# Altium PCB PCB_SATA_SFP.PcbDoc (part 1 of 2)
Units mil, origin at the board's own origin, x right, y up, seen from the top; angles counter-clockwise.
Board outline 2874.02 x 708.66 mil, 4 copper layers (Top Layer, MidPlane_1, MidPlane_2, Bottom Layer), stack 61.899 mil thick; 52 components, 38 nets, 211 pads, 119 vias.
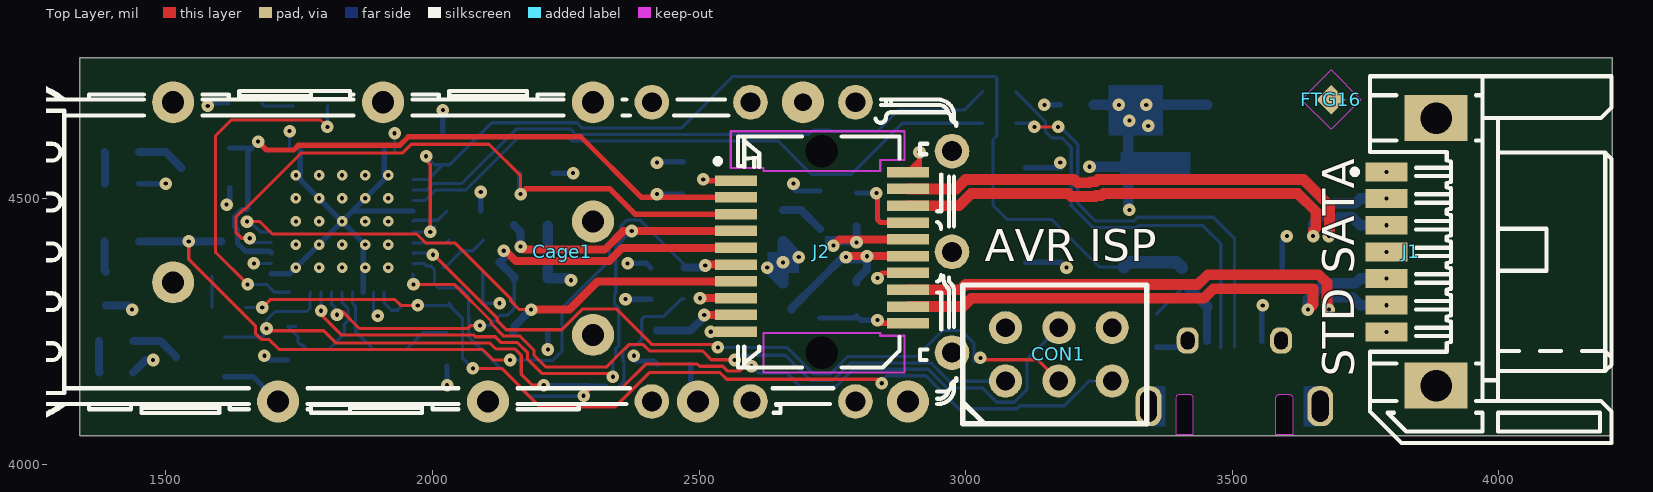
[diagram p0: Top Layer view]
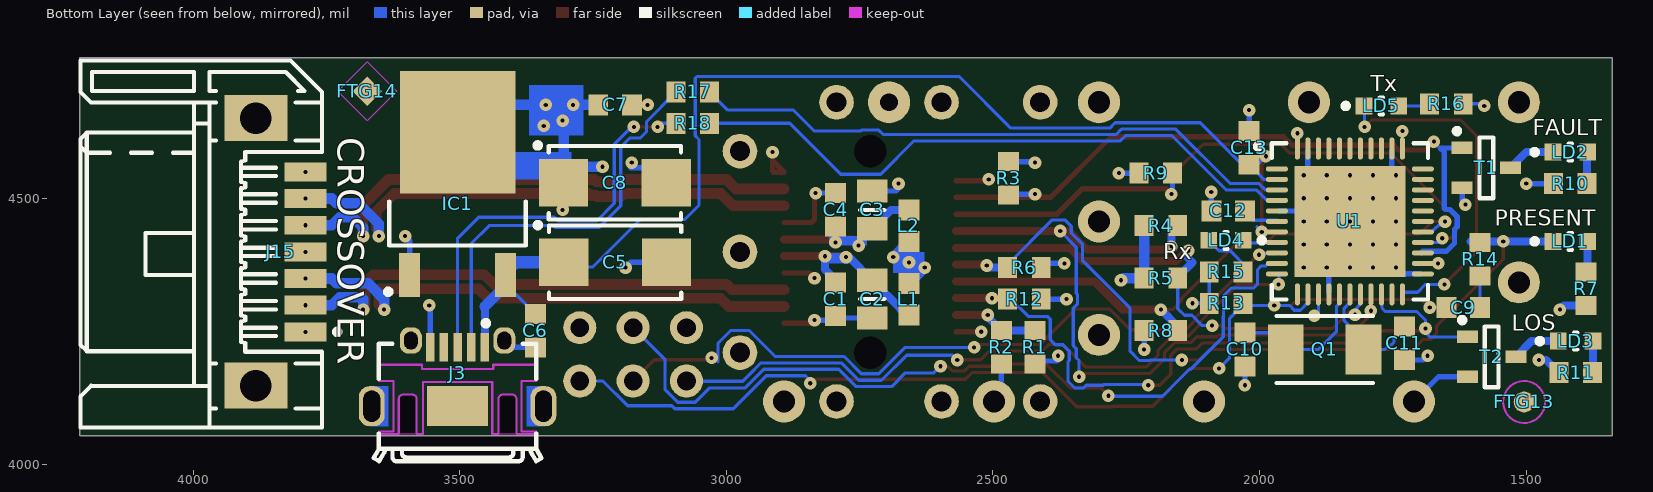
[diagram p1: Bottom Layer view, seen from below]
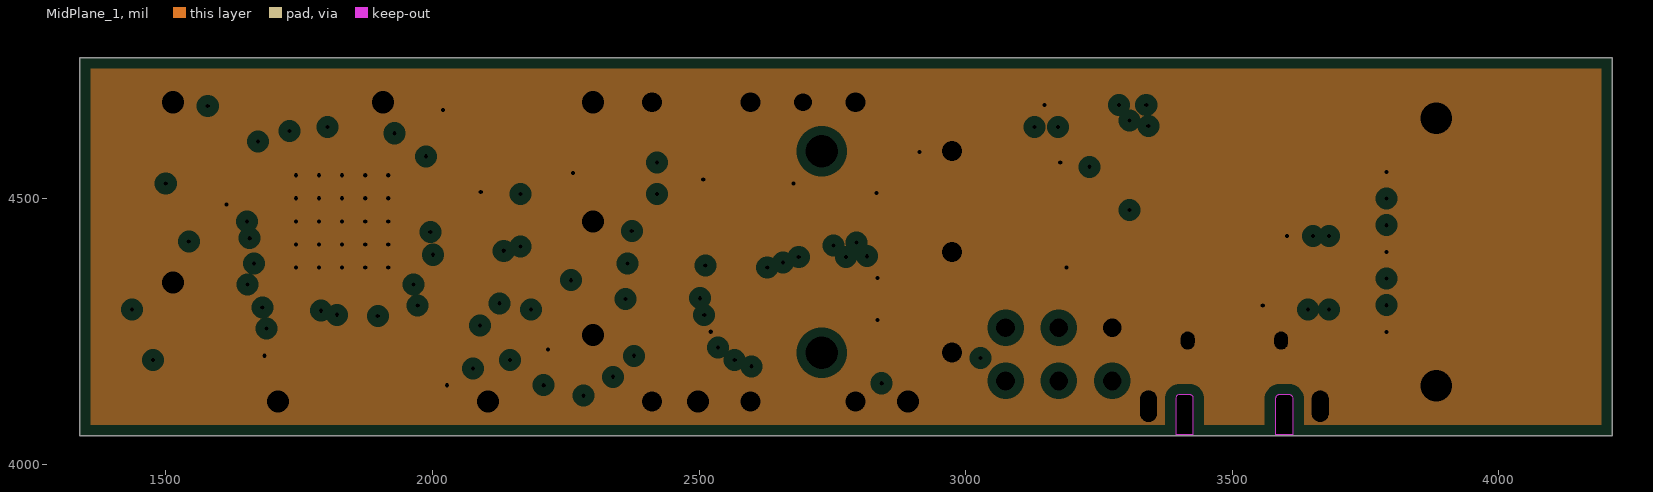
[diagram p2: MidPlane_1, clearances drawn from the general rule]
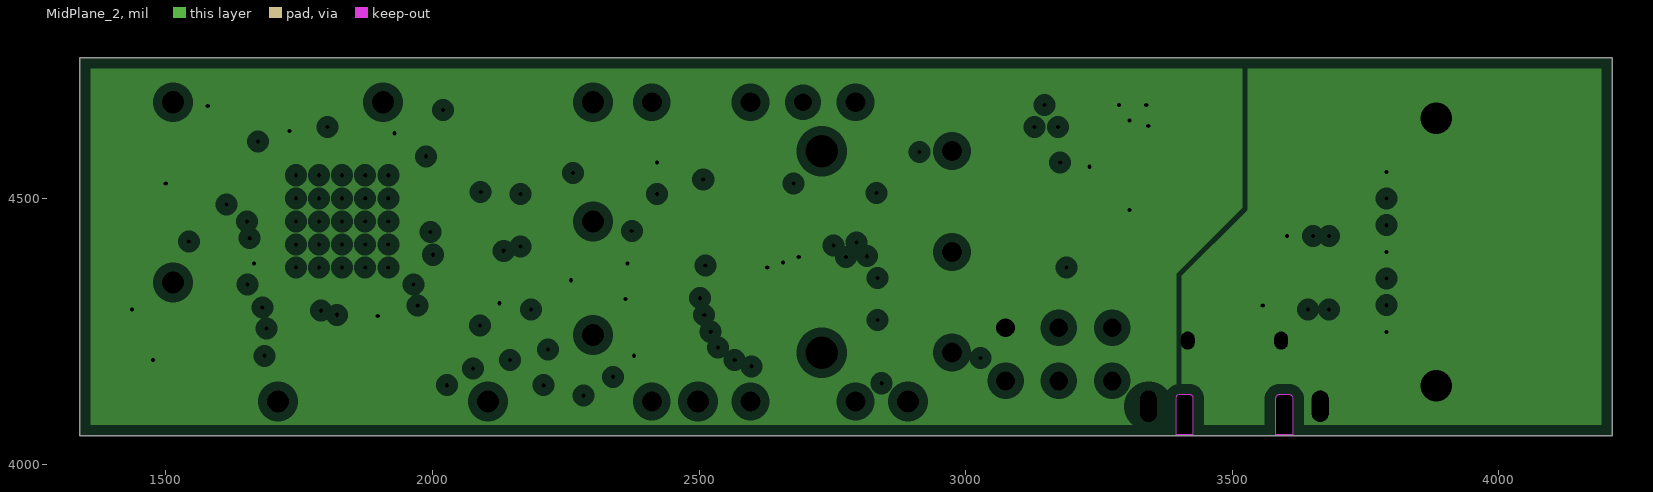
[diagram p3: MidPlane_2, clearances drawn from the general rule]
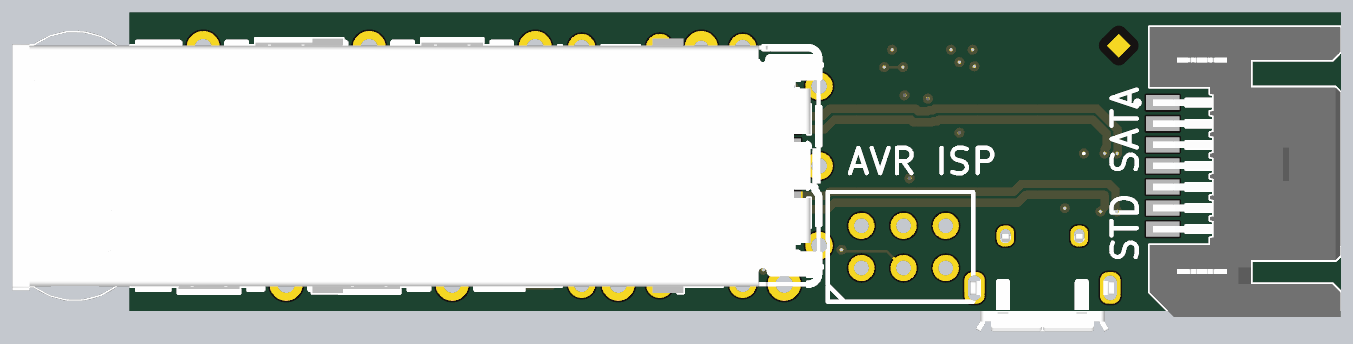
[diagram p4: 3D render of the assembled board from above, using the file's embedded part models]
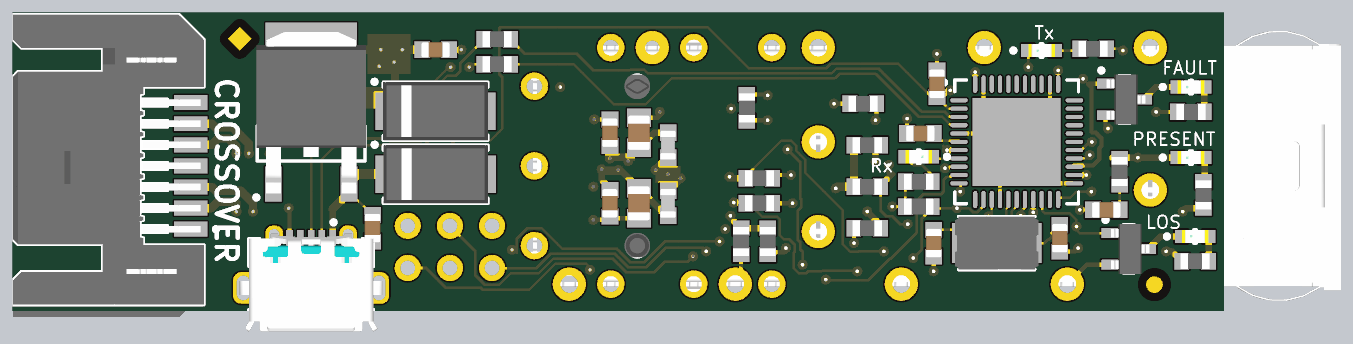
[diagram p5: 3D render of the assembled board from below, using the file's embedded part models]

## Layer stack, top to bottom
Top Solder: solder mask 0.4, Solder Resist, Dk 3.5
Top Layer: signal copper 1.4
Dielectric1: prepreg 14.1732, FR-4, Dk 4.8
MidPlane_1: plane copper 1.4, net GND
Dielectric3: core 27.9528, FR-4, Dk 4.8
MidPlane_2: plane copper 1.4, net (Multiple Nets)
Dielectric2: prepreg 14.1732, FR-4, Dk 4.8
Bottom Layer: signal copper 1.4
Bottom Solder: solder mask 0.4, Solder Resist, Dk 3.5

## Board outline
1338.58,4055.12 4212.6,4055.12 4212.6,4763.78 1338.58,4763.78

## Design rules (kind name [scope] priority, off if disabled: settings)
Clearance Clearance_KO [OnLayer('Keep-Out Layer')] p1: gap=10 ignorepadtopadclearanceinfootprint=FALSE except(0: Arc-Hole Track-Hole SMDPad-Hole THPad-Hole Via-Hole Fill-Hole Poly-Hole Region-Hole Text-Hole)
Clearance Clearance_Poly_DS [(InDifferentialPairClass('All Differential Pairs')) vs InPolygon] p2: gap=40 ignorepadtopadclearanceinfootprint=FALSE except(0: Arc-Hole Track-Hole SMDPad-Hole THPad-Hole Via-Hole Fill-Hole Poly-Hole Region-Hole Text-Hole)
Clearance [All] p3: gap=6 ignorepadtopadclearanceinfootprint=FALSE except(0: Arc-Hole Track-Hole SMDPad-Hole THPad-Hole Via-Hole Fill-Hole Poly-Hole Region-Hole Text-Hole; 15: Arc-Poly Track-Poly SMDPad-Poly THPad-Poly Via-Poly Fill-Poly Poly-Poly)
DiffPairsRouting [All] p1 off: maxlimit=6 minlimit=6 mostfreqgap=6 toplayer_minwidth=15 toplayer_maxwidth=15 toplayer_prefwidth=15 bottomlayer_minwidth=15 bottomlayer_maxwidth=15 bottomlayer_prefwidth=15 maxuncoupledlength=500
HoleSize [All] p1: absolutevalues=TRUE maxlimit=472.44 minlimit=1 maxpercent=80.000 minpercent=20.000
MinimumSolderMaskSliver [All] p1: minsoldermaskwidth=0
PlaneClearance [All] p1: clearance=16.73
PlaneConnect PlaneConnect_Via [IsVia] p1: planeconnectstyle=Direct reliefexpansion=20 reliefentries=4 reliefconductorwidth=10 reliefairgap=10
PlaneConnect [All] p2: planeconnectstyle=Relief reliefexpansion=10 reliefentries=4 reliefconductorwidth=10 reliefairgap=10
PolygonConnect PolygonConnect_Via [IsVia] p1: connectstyle=Direct reliefconductorwidth=10 reliefentries=4 polygonreliefangle="90 Angle" airgapwidth=10
PolygonConnect [All] p2: connectstyle=Relief reliefconductorwidth=10 reliefentries=4 polygonreliefangle="90 Angle" airgapwidth=10
RoomDefinition PCB_SATA_SFP [InComponentClass('PCB_SATA_SFP')] p1: confinementstyle=ConfineIn formatcopy=TRUE lockcomponents=FALSE outline -6375.21,3085.88 -4059.86,3085.88 -4059.86,3726.04 -6375.21,3726.04
RoutingVias [All] p1: holewidth=7.87 width=23.62 viastyle="Through Hole" minholewidth=7.87 minwidth=23.62 maxholewidth=23.62 maxwidth=47.24
SilkToSilkClearance [All] p1: silktosilkclearance=6
SilkToSolderMaskClearance SilkscreenOverComponentPads [IsPad] p1: minsilkscreentomaskgap=0 clearancetoexposedcopper=TRUE
SolderMaskExpansion [All] p1: expansion=4
Width Width_DS [(InDifferentialPairClass('All Differential Pairs'))] p1: maxlimit=12 minlimit=6 preferedwidth=12
Width [All] p2: maxlimit=23.54 minlimit=6 preferedwidth=23.54 minimp=50.000000 maximp=50.000000 favimp=50.000000
23 further rules are at their usual default settings.

## Classes and differential pairs
net class Diff_100Ohm: RD_N RD_P TD_N TD_P
differential pair TD: +TD_P -TD_N
differential pair RD: +RD_P -RD_N

## Components (designator, comment, footprint, x,y, rotation, side; value= is the part's Value field where it differs from the comment)
C1 "100nF" CAPC1608X87N 2795.28,4311.02 r90 bottom
C2 "10uF" CAPC2012X95N 2726.38,4311.02 r90 bottom
C3 "10uF" CAPC2012X95N 2726.38,4478.35 r270 bottom
C4 "100nF" CAPC1608X87N 2795.28,4478.35 r270 bottom
C5 "10uF" CAPMP6032X280N 3208.66,4379.92 r180 bottom
C6 "100nF" CAPC1608X87N 3358.27,4251.97 r90 bottom
C7 "100nF" CAPC1608X87N 3208.66,4675.2 r0 bottom
C8 "10uF" CAPMP6032X280N 3208.95,4529.28 r180 bottom
C9 "100nF" CAPC1608X87N 1618.11,4295.28 r180 bottom
C10 "22pF" CAPC1608X87N 2027.56,4216.54 r90 bottom
C11 "22pF" CAPC1608X87N 1728.35,4228.35 r90 bottom
C12 "1uF" CAPC1608X87N 2059.06,4476.38 r180 bottom
C13 "1uF" CAPC1608X87N 2019.68,4594.49 r270 bottom
Cage1 "SFP+" TYCO_2007198-1 2730.31,4399.61 r0 top locked
CON1 "DNP" HEADER3x2 3074.8,4157.48 r90 top
FTG13 "Use only in PCB" FIDUCIAL_TOP_C100-200 1503.94,4118.11 r90 bottom
FTG14 "Use only in PCB" FIDUCIAL_TOP_S100-200 3673.23,4700.79 r90 bottom
FTG16 "Use only in PCB" FIDUCIAL_TOP_S100-200 3685.04,4685.04 r90 top
IC1 "LD1117DT33CTR" TO228P972X240-3N-R540X510 3503.94,4527.56 r90 bottom
J1 "SATA" 3M_5607-4200-SH 3789.37,4399.61 r90 top
J2 "SFP" TYCO_1367073-1 2730.31,4399.61 r0 top locked
J3 "Micro-USB AB 2.0" HIROSE_ZX62RD-AB-5P8 3503.94,4220.47 r180 bottom
J15 "SATA" 3M_5607-4200-SH 3789.37,4399.61 r270 bottom
L1 "120R@100MHz" INDC1608X65N 2657.48,4311.02 r270 bottom
L2 "120R@100MHz" INDC1608X65N 2657.48,4448.82 r90 bottom
LD1 "Green" LED_KINGBRIGHT_KPH-1608CGCK 1417.32,4419.29 r180 bottom
LD2 "Green" LED_KINGBRIGHT_KPH-1608CGCK 1417.32,4586.61 r180 bottom
LD3 "Green" LED_KINGBRIGHT_KPH-1608CGCK 1407.48,4232.28 r180 bottom
LD4 "Green" LED_KINGBRIGHT_KPH-1608CGCK 2062.99,4421.26 r0 bottom
LD5 "Green" LED_KINGBRIGHT_KPH-1608CGCK 1771.65,4673.23 r180 bottom
Q1 "8MHz" XTAL_TXC_7A 1877.95,4216.54 r180 bottom
R1 "10k" RESC1608X55N 2421.26,4220.47 r270 bottom
R2 "0" RESC1608X55N 2484.25,4220.47 r90 bottom
R3 "10k" RESC1608X55N 2470.47,4537.4 r90 bottom
R4 "10k" RESC1608X55N 2185.04,4448.82 r0 bottom
R5 "10k" RESC1608X55N 2185.04,4350.39 r0 bottom
R6 "10k" RESC1608X55N 2440.94,4370.08 r180 bottom
R7 "240" RESC1608X55N 1387.8,4330.71 r270 bottom
R8 "470" RESC1608X55N 2185.04,4251.97 r180 bottom
R9 "10k" RESC1608X55N 2194.88,4547.24 r180 bottom
R10 "240" RESC1608X55N 1417.32,4527.56 r0 bottom
R11 "240" RESC1608X55N 1407.48,4173.23 r0 bottom
R12 "10k" RESC1608X55N 2440.94,4311.02 r180 bottom
R13 "10k" RESC1608X55N 2062.99,4303.15 r0 bottom
R14 "0" RESC1608X55N 1586.61,4385.83 r90 bottom
R15 "240" RESC1608X55N 2062.99,4362.2 r0 bottom
R16 "240" RESC1608X55N 1649.61,4677.17 r180 bottom
R17 "22" RESC1608X55N 3062.99,4699.8 r180 bottom
R18 "22" RESC1608X55N 3062.99,4640.75 r180 bottom
T1 "BSH103" SOT95P230X110-3N 1574.8,4557.09 r180 bottom
T2 "BSH103" SOT95P230X110-3N 1564.96,4202.76 r180 bottom
U1 "ATmega32U4-MU" 44PW_M 1830.71,4456.69 r180 bottom

## Footprints (in the part's own frame and the unit in brackets; to place one, negate y for a bottom-side part, rotate by r counter-clockwise, add the part's x,y. Pads: shape width x height; smd on the part's side, far side on the other; paste and mask are expansions set on the pad)
3M_5607-4200-SH [mm] "1.27mm (.050\") Pitch, Surface Mount, Right Angle, Serial ATA Plug (SATA)"
  rect 0.9x2 smd: 1(3.81,0) 2(2.54,0) 3(1.27,0) 4(0,0) 5(-1.27,0) 6(-2.54,0) 7(-3.81,0)
  rect 2.2x3 hole 1.5: 8(-6.37,-2.36) 8(6.37,-2.36)
  silkscreen extent -9.11,-10.71 8.36,1.64, body extent -9.11,-10.71 8.36,0.79, height 4
44PW_M [mm] "QFN, 44-Leads, Body 7x7mm, Pitch 0.5mm, Thermal Pad 5.3x5.3mm, IPC Low Density"
  oval 1.05x0.25 smd: 1(-3.475,2.5) 2(-3.475,2) 3(-3.475,1.5) 4(-3.475,1) 5(-3.475,0.5) 6(-3.475,0) 7(-3.475,-0.5) 8(-3.475,-1) 9(-3.475,-1.5) 10(-3.475,-2) 11(-3.475,-2.5) 23(3.475,-2.5) 24(3.475,-2) 25(3.475,-1.5) 26(3.475,-1) 27(3.475,-0.5) 28(3.475,0) 29(3.475,0.5) 30(3.475,1) 31(3.475,1.5) 32(3.475,2) 33(3.475,2.5)
  oval 0.25x1.05 smd: 12(-2.5,-3.475) 13(-2,-3.475) 14(-1.5,-3.475) 15(-1,-3.475) 16(-0.5,-3.475) 17(0,-3.475) 18(0.5,-3.475) 19(1,-3.475) 20(1.5,-3.475) 21(2,-3.475) 22(2.5,-3.475) 34(2.5,3.475) 35(2,3.475) 36(1.5,3.475) 37(1,3.475) 38(0.5,3.475) 39(0,3.475) 40(-0.5,3.475) 41(-1,3.475) 42(-1.5,3.475) 43(-2,3.475) 44(-2.5,3.475)
  rect 5.3x5.3 smd: 45(0,0)
  silkscreen extent -4.5,-3.73 3.73,3.72, body extent -3.57,-3.58 3.58,3.57, height 0.9
CAPC1608X87N [mm] "Chip Capacitor, Body 1.6x0.8mm IPC Medium Density"
  rect 0.95x1 smd: 1(-0.8,0) 2(0.8,0)
  body extent -0.87,-0.47 0.88,0.48, height 0.87
CAPC2012X95N [mm] "Chip Capacitor, Body 2.0x1.25mm, IPC Medium Density"
  rect 1.1x1.45 smd: 1(-0.9,0) 2(0.9,0)
  silkscreen extent 0,-0.58 0,0.58, body extent -1.05,-0.67 1.05,0.68, height 0.95
CAPMP6032X280N [mm] "Capacitor, Polarized, Molded  Body 6.0x3.2mm, IPC Medium Density"
  rect 2.35x2.25 smd: 1(-2.45,0) 2(2.45,0)
  silkscreen extent -3.8,-1.75 3.15,1.9, body extent -3.15,-1.75 3.15,1.75, height 2.8
FIDUCIAL_TOP_C100-200 [mm] "Round Fiducial Target, Top Layer, 1.0mm, Top Solder 2.0mm, Keepout =2.0mm"
  round 1 smd paste-0.51 mask+0.5: FTG2(0,0)
  Top Layer keep-out circle w0.1: c0,0 r1
FIDUCIAL_TOP_S100-200 [mm] "Square Fiducial Target, Top Layer, 1.0mm, Top Solder 2.0mm, Keepout =2.0mm"
  rect 1x1 smd rot 45 paste-0.51 mask+0.5: 1(0,0)
  Top Layer keep-out region: 1.414,0 0,-1.414 -1.414,0 0,1.414
HEADER3x2 [mil]
  round 62 hole 35: 1(0,0) 2(100,0) 3(0,-100) 4(100,-100) 5(0,-200) 6(100,-200)
  silkscreen extent -80,-265 180,80
HIROSE_ZX62RD-AB-5P8 [mm] "Right Angle, SMD Micro-USB Type AB - Reverse (Top mount), Shell Through Hole"
  rect 0.4x1.35 smd: 1(1.3,0) 2(0.65,0) 3(0,0) 4(-0.65,0) 5(-1.3,0)
  rrect80% 1.225x1.9 hole 0.8 slot 1.5 at 90 deg: 6(-4.088,-2.8) 6(4.088,-2.8)
  rrect80% 1.05x1.25 hole 0.65 slot 0.85 at 90 deg: 6(-2.225,0.325) 6(2.225,0.325)
  rect 2.9x1.9 smd: PastePad(0,-2.8)
  Top Layer region: 4.2,-3.75 4.2,-1.85 3.3,-1.85 3.3,-1.85 3.3,-3.75
  Top Layer region: -4.2,-1.85 -4.2,-3.75 -3.3,-3.75 -3.3,-3.75 -3.3,-1.85
  Top Layer keep-out lines w0.1: 3.75,-4.125 2.8,-4.125 2.8,-2.45 ccw(c2.6,-2.45) 2.6,-2.25 2.15,-2.25 ccw(c2.15,-2.45) 1.95,-2.45 1.95,-4.125 1.65,-4.125 1.65,-1.65 -1.65,-1.65 -1.65,-4.125 -1.95,-4.125 -1.95,-2.45 ccw(c-2.15,-2.45) -2.15,-2.25 -2.6,-2.25 ccw(c-2.6,-2.45) -2.8,-2.45 -2.8,-4.125 -3.75,-4.125 -3.75,-4 -3.05,-4 -3.05,-1.6 -3.75,-1.6 -3.75,-0.825 -1.7,-0.825 -1.7,-1.025 1.7,-1.025 1.7,-0.825 3.75,-0.825 3.75,-1.6 3.05,-1.6 3.05,-4 3.75,-4 3.75,-4.125
  Keep-Out Layer board cut-out: -2.8,-4.125 -2.8,-2.45 -2.785,-2.373 -2.741,-2.309 -2.676,-2.265 -2.6,-2.25 -2.6,-2.25 -2.15,-2.25 -2.073,-2.265 -2.009,-2.309 -1.965,-2.373 -1.95,-2.45 -1.95,-2.45 -1.95,-4.125
  Keep-Out Layer board cut-out: 1.95,-4.125 1.95,-2.45 1.965,-2.373 2.009,-2.309 2.074,-2.265 2.15,-2.25 2.15,-2.25 2.6,-2.25 2.677,-2.265 2.741,-2.309 2.785,-2.373 2.8,-2.45 2.8,-2.45 2.8,-4.125
  silkscreen extent -4,-5.42 4,1.27, body extent -4.32,-5.42 4.33,0.47, height 2.78
INDC1608X65N [mm] "Chip Inductor, 2-Leads, EIA 0603, Metric 1608, Body 1.6x0.8mm, IPC Medium Density"
  rect 1x1 smd: 1(-0.75,0) 2(0.75,0)
  body extent -0.87,-0.47 0.88,0.48, height 0.65
LED_KINGBRIGHT_KPH-1608CGCK [mm] "SMT Green LED, Case 0603, Body L 1.6 x W 0.8mm H 0.65mm"
  rect 0.8x0.8 smd: 1(-0.825,0) 2(0.825,0)
  silkscreen extent -1.83,-0.4 0.08,0.4, body extent -0.8,-0.4 0.8,0.4, height 0.65
RESC1608X55N [mm] "Chip Resistor, EIA 0603, Metric 1608, Body 1.6x0.8mm, IPC Medium Density"
  rect 0.9x1 smd: 1(-0.8,0) 2(0.8,0)
  body extent -0.87,-0.47 0.88,0.48, height 0.55
SOT95P230X110-3N [mm] "SOT23, 3 pin, Pitch 0.95mm - 1.3mm W X 2.9mm L X 1.1mm H, IPC Medium Density"
  rect 1x0.6 smd: 1(-1.15,0.95) 2(-1.15,-0.95) 3(1.15,0)
  silkscreen extent -1.53,-1.45 0.33,1.87, body extent -1.08,-1.5 1.25,1.5, height 1.1
TO228P972X240-3N-R540X510 [mm] "DPAK TO-252, 2.28mm pitch; 2 pin, 9.725mm L X 6.10mm W X 2.40mm H body, IPC Medium Density"
  rect 2.1x1 smd: 1(-4.35,2.28) 2(-4.35,-2.28)
  rect 5.85x5.5 smd: 3(2.45,0)
  silkscreen extent -5.27,-3.25 -0.85,3.43, body extent -4.9,-3.3 4.82,3.3, height 2.4
TYCO_1367073-1 [mm] "20 Position, Pitch 0.8mm SFP Receptacle (Small Form-factor Pluggable)"
  rect 2x0.5 smd: 1(-4.1,3.395) 2(-4.1,2.595) 3(-4.1,1.795) 4(-4.1,0.995) 5(-4.1,0.195) 6(-4.1,-0.605) 7(-4.1,-1.405) 8(-4.1,-2.205) 9(-4.1,-3.005) 10(-4.1,-3.805) 11(4.1,-3.405) 12(4.1,-2.605) 13(4.1,-1.805) 14(4.1,-1.005) 15(4.1,-0.205) 16(4.1,0.595) 17(4.1,1.395) 18(4.1,2.195) 19(4.1,2.995) 20(4.1,3.795)
  round 0.5 hole 1.55 unplated mask+0.525: MTG1(0,4.795) MTG2(0,-4.805)
  Top Layer keep-out lines w0.1: -4.34,3.985 -4.34,5.745 3.94,5.745 3.94,4.385 2.78,4.385 2.78,3.845 -2.78,3.845 -2.78,3.985 -4.34,3.985 ; -2.78,-5.755 3.94,-5.755 3.94,-4.805 3.94,-3.995 2.78,-3.995 2.78,-3.855 -2.78,-3.855 -2.78,-4.395 -2.78,-5.755
  silkscreen extent -5.08,-5.51 3.7,5.5, body extent -4.5,-5.5 4.5,5.5, height 5.22
TYCO_2007198-1 [mm] "SFP+ 1x1 Press Fit Cage"
  round 2 hole 1.05: 1(-30.9,7.125) 2(-20.9,7.125) 3(-10.9,7.125) 4(-10.9,1.445) 5(-30.9,-1.455) 6(-10.9,-3.955) 7(-25.9,-7.125) 8(-15.9,-7.125) 9(-5.9,-7.125) 10(4.1,-7.125)
  round 1.65 hole 0.95: 11(-8.1,7.125) 12(-3.4,7.125) 13(1.6,7.125) 14(6.2,4.8) 15(6.2,0) 16(6.2,-4.8) 17(-8.1,-7.125) 18(-3.4,-7.125) 19(1.6,-7.125)
  round 2 hole 0.85: 20(-0.9,7.125)
  silkscreen extent -42.4,-8.15 6.4,8.15, body extent -42.4,-8.15 6.4,8.15, height 10.6
XTAL_TXC_7A [mm] "2 Pins, 3.2x5mm, SMD Glass Seam Sealing Crystal, 7A Serie"
  rect 1.7x2.4 smd: 1(-1.85,0) 2(1.85,0)
  silkscreen extent -2.3,-1.6 2.3,1.6, body extent -2.5,-1.6 2.5,1.6, height 1.2

## Part data
C1 C4 C6 C7 C9: library part CC0603_100NF_50V_10%_X5R, "Non-polarised capacitor", Case=0603, Manufacturer=GENERIC, Manufacturer1 ComponentHeight=0.9mm, Manufacturer1 Example=TDK, Manufacturer1 Part Number=C1608X5R1H104K080AA, Tolerance=±10%, Voltage=50V, Author="CERN DEM MR", Component Type=Standard, CreateDate=08.01.2016, HelpURL=\\cern.ch\dfs\Applications\Altium\Datasheets\CC0603_X5R_TDK_C.pdf, LatestRevisionDate=08.01.2016, Manufacturer Part Number=CC0603_100NF_50V_10%_X5R, Mounted=Yes, Part Description="SMD Multilayer Chip Ceramic Capacitor", Part Number=CC0603_100NF_50V_10%_X5R, Pin Count=2, Sense=No, SMD=Yes, Socket=No, Status=None, TC=X5R
C2 C3: library part CC0805_10UF_25V_10%_X5R, "Non-polarised capacitor", Case=0805, Manufacturer=GENERIC, Manufacturer1 ComponentHeight=0.95mm, Manufacturer1 Example=MURATA, Manufacturer1 Part Number=GRM219R61E106KA12D, Tolerance=±10%, Voltage=25V, Author="CERN DEM JLC", Component Type=Standard, CreateDate=25.10.2012, HelpURL=\\cern.ch\dfs\Applications\Altium\Datasheets\CC0805_X5R_MURATA_GRM.pdf, LatestRevisionDate=06.09.2016, Manufacturer Part Number=CC0805_10UF_25V_10%_X5R, Mounted=Yes, Part Description="SMD Multilayer Chip Ceramic Capacitor", Part Number=CC0805_10UF_25V_10%_X5R, Pin Count=2, Sense=No, SMD=Yes, Socket=No, Status=Preferred, TC=X5R
C5 C8: library part CTE6032-28_10UF_25V_10%_LESR0300, "Polarised capacitor", Case=C, Manufacturer=GENERIC, Manufacturer1 ComponentHeight=2.8mm, Manufacturer1 Example="VISHAY SPRAGUE", Manufacturer1 Part Number=TR3C106K025C0300, Tolerance=±10%, Voltage=25V, Author="CERN DEM JLC", Component Type=Standard, CreateDate=30.08.2011, HelpURL=\\cern.ch\dfs\Applications\Altium\Datasheets\CTE_VISHAY_TR3.pdf, LatestRevisionDate=30.08.2011, Manufacturer Part Number=CTE6032-28_10UF_25V_10%_LESR0300, Mounted=Yes, Part Description="Low ESR 0R3 Solid Tantalum Chip Capacitor", Part Number=CTE6032-28_10UF_25V_10%_LESR0300, Pin Count=2, Sense=No, SMD=Yes, Socket=No, Status=Preferred
C10 C11: library part CC0603_22PF_50V_5%_NP0, "Non-polarised capacitor", Case=0603, Manufacturer=GENERIC, Manufacturer1 ComponentHeight=0.87mm, Manufacturer1 Example=PHYCOMP, Manufacturer1 Part Number=223886715229, Tolerance=±5%, Voltage=50V, Author="CERN DEM JLC", Component Type=Standard, CreateDate=03.12.2007, HelpURL=\\cern.ch\dfs\Applications\Altium\Datasheets\CC0603_NP0_PHYCOMP.pdf, LatestRevisionDate=03.12.2007, Manufacturer Part Number=CC0603_22PF_50V_5%_NP0, Mounted=Yes, Part Description="SMD Multilayer Chip Ceramic Capacitor", Part Number=CC0603_22PF_50V_5%_NP0, Pin Count=2, Sense=No, SMD=Yes, Socket=No, Status=Preferred, TC=C0G/NP0
C12 C13: library part CC0603_1UF_16V_10%_X7R, "Non-polarised capacitor", Case=0603, Manufacturer=GENERIC, Manufacturer1 ComponentHeight=0.9mm, Manufacturer1 Example="YAGEO PHYCOMP", Manufacturer1 Part Number=223878615663, Manufacturer Part Number=CC0603_1uF_16V_10%_X7R, Tolerance=±10%, Voltage=16V, Author="CERN DEM JLC", Component Type=Standard, CreateDate=03.12.2007, HelpURL=\\cern.ch\dfs\Applications\Altium\Datasheets\CC0603_X7R_PHYCOMP.pdf, LatestRevisionDate=17.04.2015, Mounted=Yes, Part Description="SMD Multilayer Chip Ceramic Capacitor", Part Number=CC0603_1UF_16V_10%_X7R, Pin Count=2, Sense=No, SMD=Yes, Socket=No, Status=None, TC=X7R
Cage1: library part TYCO_2007198-1, "SFP+ 1x1 Cage (20Pins)", Manufacturer="TYCO ELECTRONICS", Manufacturer Part Number=2007198-1, Author="CERN DEM JLC", ClassName=Connectors, ComponentHeight=9.7mm, Component Type=Standard, CreateDate=04.06.2013, Family=SFP+, HelpURL=\\cern.ch\dfs\Applications\Altium\Datasheets\TYCO_2007198-1.pdf, LatestRevisionDate=12.06.2013, Mounted=Yes, Part Description="1x1 Press Fit Cage For Use with SFP+ Connector (Small Form-factor Pluggable)", Part Number=TYCO_2007198-1, Pin Count=20, PressFit=Yes, Sense=No, SMD=No, Socket=No, Status=None
CON1: library part CON_ISP, "6x 2.54mm SMT  dual row pin header"
FTG13: library part FIDUCIAL_TARGET_C100-200, "Fiducial Target", Author="CERN DEM JLC", ComponentHeight=0mm, Component Type="Standard (No BOM)", CreateDate=09.02.2010, Family=Fiducial, HelpURL=Undefined, LatestRevisionDate=04.04.2012, Mounted=No, PackageDescription="Round Fiducial Target, Top Layer, 1.0mm, Top Solder 2.0mm, Keepout =2.0mm", Part Description="Round Fiducial Target, Top Layer, 1.0mm, Top Solder 2.0mm, Keepout =2.0mm", Part Number=FIDUCIAL_TARGET_C100-200, Pin Count=1, Sense=No, SMD=Yes, Socket=No, Status=None
FTG14 FTG16: library part FIDUCIAL_TARGET_S100-200, "Fiducial Target", Author="CERN DEM JLC", ComponentHeight=0mm, Component Type="Standard (No BOM)", CreateDate=09.02.2010, Family=Fiducial, HelpURL=Undefined, LatestRevisionDate=04.04.2012, Mounted=No, PackageDescription="Square Fiducial Target, Top Layer, 1.0mm, Top Solder 2.0mm, Keepout =2.0mm", Part Description="Square Fiducial Target, Top Layer, 1.0mm, Top Solder 2.0mm, Keepout =2.0mm", Part Number=FIDUCIAL_TARGET_S100-200, Pin Count=1, Sense=No, SMD=Yes, Socket=No, Status=None
IC1: "3-Terminal Regulator 1=GND 2=IN 3=OUT", Case=DPAK, Manufacturer="ST MICROELECTRONICS", Author="CERN DEM JLC", Bonding=No, ComponentHeight=2.4mm, Component Type=Standard, CreateDate=08.06.2011, Device=LD1117DT33CTR, HelpURL=\\cern.ch\dfs\Applications\Altium\Datasheets\LD1117DT33CTR.pdf, LatestRevisionDate=08.06.2011, Manufacturer Part Number=LD1117DT33CTR, Mounted=Yes, PackageDescription="DPAK TO-252, 2.28mm pitch; 2 pin, 9.725mm L X 6.10mm W X 2.40mm H body, IPC Medium Density", Part Description="3.3V 800mA Low drop fixed and adjustable positive voltage regulators", Part Number=LD1117DT33CTR, Pin Count=3, PressFit=No, Sense=No, SMD=Yes, Socket=No
J1 J15: library part 3M_5607-4200-SH, "7 Pin + 1 Shield SATA Receptacle", Manufacturer=3M, Manufacturer Part Number=5607-4200-SH, Author="CERN DEM JLC", ComponentHeight=4mm, Component Type=Standard, CreateDate=14.02.2011, Family=SATA, HelpURL=\\cern.ch\dfs\Applications\Altium\Datasheets\3M_5607-4200-SH.pdf, LatestRevisionDate=31.05.2011, Mounted=Yes, Part Description="Signal Plug, Surfacemount, Right Angle,  Serial Advanced Technology Attachment (SATA) Connector, 5607 Series", Part Number=3M_5607-4200-SH, Pin Count=8, PressFit=No, Sense=No, SMD=Yes, Socket=No, Status=None
J2: library part TYCO_1367073-1, "20 Position SFP  Connector (Small Form-factor Pluggable)", Manufacturer="TYCO ELECTRONICS", Manufacturer Part Number=1367073-1, Author="CERN DEM JLC", ComponentHeight=5.4mm, ComponentLink1Description=Application, ComponentLink1URL=\\cern.ch\dfs\Applications\Altium\Datasheets\TYCO_SFP_Application.pdf, ComponentLink2Description="SFP Specification", ComponentLink2URL=\\cern.ch\dfs\Applications\Altium\Datasheets\Tyco_SFP_Specification.pdf, Component Type=Standard, CreateDate=25.01.2010, Family=SFP, HelpURL=\\cern.ch\dfs\Applications\Altium\Datasheets\TYCO_1367073-1.pdf, LatestRevisionDate=25.01.2010, Mounted=Yes, Part Description="20 Position, Pitch 0.8mm SFP Receptacle (Small Form-factor Pluggable)", Part Number=TYCO_1367073-1, Pin Count=20, PressFit=No, Sense=No, SMD=Yes, Socket=No, Status=None
J3: library part HIROSE_ZX62RD-AB-5P8, "5 Pin + 1 Shield USB Receptacle", Manufacturer="HIROSE (HRS)", Manufacturer Part Number=ZX62RD-AB-5P8, Author="CERN DEM JLC", ClassName=Connectors, ComponentHeight=2.35mm, ComponentLink1Description=Package-Drawing, ComponentLink1URL=\\cern.ch\dfs\Applications\Altium\Datasheets\HIROSE_ZX62RD-AB-5P8_Package-Drawing.pdf, Component Type=Standard, CreateDate=29.10.2014, Family="Micro-USB AB 2.0", HelpURL=\\cern.ch\dfs\Applications\Altium\Datasheets\HIROSE_ZX62RD-AB-5P8.pdf, LatestRevisionDate=29.10.2014, Mounted=Yes, Part Description="Micro-USB 2.0 Right Angle, SMD Type AB - Reverse (Top mount), Shell Through Hole", Part Number=HIROSE_ZX62RD-AB-5P8, Pin Count=7, PressFit=No, Sense=No, SMD=Yes, Socket=No, Status=None
L1 L2: library part IND0603_MURATA_BLM18SG121TN1D, "Inductor", Case=0603, Manufacturer=MURATA, Manufacturer Part Number=BLM18SG121TN1D, Power=3A, Resistance=0.025R, Tolerance=±25%, Author="CERN DEM JLC", ComponentHeight=0.65mm, Component Type=Standard, CreateDate=23.07.2014, HelpURL=\\cern.ch\dfs\Applications\Altium\Datasheets\IND0603_MURATA_BLM18S.pdf, LatestRevisionDate=23.07.2014, Mounted=Yes, Part Description="SMD EMIFIL Suppression Chip Ferrite Bead", Part Number=IND0603_MURATA_BLM18SG121TN1D, Pin Count=2, Sense=No, SMD=Yes, Socket=No, Status=None
LD1 LD2 LD3 LD4 LD5: library part LED_KINGBRIGHT_KPH-1608CGCK, "LED Green 1C 2A", Manufacturer=KINGBRIGHT, Manufacturer Part Number=KPH-1608CGCK, Author="CERN DEM JLC", Bonding=No, Color=Green, ComponentHeight=0.65mm, Component Type=Standard, CreateDate=03.07.2017, HelpURL=\\cern.ch\dfs\Applications\Altium\Datasheets\LED_KINGBRIGHT_KPH-1608CGCK.pdf, LatestRevisionDate=03.07.2017, Mounted=Yes, PackageDescription="SMT Green LED, Case 0603, Body L 1.6 x W 0.8mm H 0.65mm", Part Description="SMD Green LED, Case 1.6mmX0.8mm(0603), 0.65mm Thickness", Part Number=LED_KINGBRIGHT_KPH-1608CGCK, Pin Count=2, PressFit=No, Sense=No, SMD=Yes, Socket=No
Q1: library part XTAL_8MHZ_TXC_7A-8.000MAAE-T, "Quartz Crystal", Manufacturer="TXC CORPORATION", Manufacturer Part Number=7A-8.000MAAE-T, Author="CERN DEM JLC", Bonding=No, ComponentHeight=1.2mm, Component Type=Standard, CreateDate=09.10.2014, HelpURL=\\cern.ch\dfs\Applications\Altium\Datasheets\XTAL_TXC_7A.pdf, LatestRevisionDate=12.11.2014, Mounted=Yes, PackageDescription="2 Pins, 3.2x5mm, SMD Glass Seam Sealing Crystal, 7A Serie", Part Description="Tolerance: ±30ppm, Stability: ±30ppm, -20°C to +70°C, 12pF, SMD Glass Seam Sealing Crystal, 7A Series", Part Number=XTAL_8MHZ_TXC_7A-8.000MAAE-T, Pin Count=2, PressFit=No, Sense=No, SMD=Yes, Socket=No
R1 R3 R4 R5 R6 R9 R12 R13: library part R0603_10K_1%_0.1W_100PPM, "Resistor - 1%", Case=0603, Manufacturer=GENERIC, Manufacturer1 ComponentHeight=0.55mm, Manufacturer1 Example="NIC COMPONENT", Manufacturer1 Part Number=NRC06F1002TRF, Power=0.1W, Tolerance=±1%, Author="CERN DEM JLC", Component Type=Standard, CreateDate=03.12.2007, HelpURL=\\cern.ch\dfs\Applications\Altium\Datasheets\R0603_NIC_NRC.pdf, LatestRevisionDate=13.03.2008, Manufacturer Part Number=R0603_10K_1%_0.1W_100PPM, Mounted=Yes, Part Description="General Purpose Thick Film Chip Resistor", Part Number=R0603_10K_1%_0.1W_100PPM, Pin Count=2, PressFit=No, Sense=No, SMD=Yes, Socket=No, Status=Preferred, TC=±100ppm/°C
R2 R14: library part R0603_0R_JUMPER, "Resistor", Case=0603, Manufacturer=GENERIC, Manufacturer1 ComponentHeight=0.55mm, Manufacturer1 Example="NIC COMPONENT", Manufacturer1 Part Number=NRC06Z0, Author="CERN DEM JLC", Component Type=Standard, CreateDate=03.12.2007, HelpURL=\\cern.ch\dfs\Applications\Altium\Datasheets\R0603_NIC_NRC.pdf, LatestRevisionDate=13.03.2008, Manufacturer Part Number=R0603_0R_JUMPER, Mounted=Yes, Part Description="1A (0.05R Max DC Resistance) Zero Ohm Jumper", Part Number=R0603_0R_JUMPER, Pin Count=2, PressFit=No, Sense=No, SMD=Yes, Socket=No, Status=Preferred
R7 R10 R11 R15 R16: library part R0603_240R_1%_0.1W_100PPM, "Resistor - 1%", Case=0603, Manufacturer=GENERIC, Manufacturer1 ComponentHeight=0.55mm, Manufacturer1 Example="NIC COMPONENT", Manufacturer1 Part Number=NRC06F2400TRF, Power=0.1W, Tolerance=±1%, Author="CERN DEM JLC", Component Type=Standard, CreateDate=03.12.2007, HelpURL=\\cern.ch\dfs\Applications\Altium\Datasheets\R0603_NIC_NRC.pdf, LatestRevisionDate=13.03.2008, Manufacturer Part Number=R0603_240R_1%_0.1W_100PPM, Mounted=Yes, Part Description="General Purpose Thick Film Chip Resistor", Part Number=R0603_240R_1%_0.1W_100PPM, Pin Count=2, PressFit=No, Sense=No, SMD=Yes, Socket=No, Status=Preferred, TC=±100ppm/°C
R8: library part R0603_470R_1%_0.1W_100PPM, "Resistor - 1%", Case=0603, Manufacturer=GENERIC, Manufacturer1 ComponentHeight=0.55mm, Manufacturer1 Example="NIC COMPONENT", Manufacturer1 Part Number=NRC06F4700TRF, Power=0.1W, Tolerance=±1%, Author="CERN DEM JLC", Component Type=Standard, CreateDate=03.12.2007, HelpURL=\\cern.ch\dfs\Applications\Altium\Datasheets\R0603_NIC_NRC.pdf, LatestRevisionDate=13.03.2008, Manufacturer Part Number=R0603_470R_1%_0.1W_100PPM, Mounted=Yes, Part Description="General Purpose Thick Film Chip Resistor", Part Number=R0603_470R_1%_0.1W_100PPM, Pin Count=2, PressFit=No, Sense=No, SMD=Yes, Socket=No, Status=Preferred, TC=±100ppm/°C
R17 R18: library part R0603_22R_1%_0.1W_100PPM, "Resistor - 1%", Case=0603, Manufacturer=GENERIC, Manufacturer1 ComponentHeight=0.55mm, Manufacturer1 Example="NIC COMPONENT", Manufacturer1 Part Number=NRC06F22R0TRF, Power=0.1W, Tolerance=±1%, Author="CERN DEM JLC", Component Type=Standard, CreateDate=03.12.2007, HelpURL=\\cern.ch\dfs\Applications\Altium\Datasheets\R0603_NIC_NRC.pdf, LatestRevisionDate=13.03.2008, Manufacturer Part Number=R0603_22R_1%_0.1W_100PPM, Mounted=Yes, Part Description="General Purpose Thick Film Chip Resistor", Part Number=R0603_22R_1%_0.1W_100PPM, Pin Count=2, PressFit=No, Sense=No, SMD=Yes, Socket=No, Status=Preferred, TC=±100ppm/°C
T1 T2: "N-CHANNEL MOSFET WITH DIODE", Case=SOT23-3, Manufacturer=NEXPERIA, Author="CERN DEM JLC", Bonding=No, ComponentHeight=1.1mm, Component Type=Standard, CreateDate=16.03.2010, Device=BSH103, HelpURL=\\cern.ch\dfs\Applications\Altium\Datasheets\BSH103.pdf, LatestRevisionDate=20.06.2017, Manufacturer Part Number=BSH103, Mounted=Yes, PackageDescription="SOT23, 3 pin, Pitch 0.95mm - 1.3mm W X 2.9mm L X 1.1mm H, IPC Medium Density", Part Description="30V 850mA N-Channel Enhancement Mode Field-Effect Transistor", Part Number=BSH103, Pin Count=3, PressFit=No, Sense=No, SMD=Yes, Socket=No
U1: library part CMP-0095-00166-2, "8-bit AVR Microcontroller, 2.7-5.5V, 16MHz, 32KB Flash, 1KB EEPROM, 2.5KB SRAM, USB Controller, 44-pin QFN, Industrial Grade (-40°C to 85°C), Ext Osc", Code_JEDEC=MO-220-VKKD-1, ComponentLink1Description="Manufacturer URL", ComponentLink1URL=http://www.atmel.com/, ComponentLink2Description="ATmega16U4/32U4 Datasheet", ComponentLink2URL=http://www.atmel.com/dyn/resources/prod_documents/doc7766.pdf, ComponentLink3Description="ATmega16U4 ATmega32U4 Summary", ComponentLink3URL=http://www.atmel.com/dyn/resources/prod_documents/7766S.pdf, DatasheetVersion="revF, Nov-2010", PackageDescription="44-Pin Quad Flat No-Lead Package, 7 x 7 mm Body, 0.5 mm Pitch (QFN)", PackageReference=44PW, PackageVersion="revG, Sep-2009", RevisionNote="DatasheetVersion, PackageVersion & PCB updated. URLs added."

## Via types
v1: diameter 23.62, hole 7.87, Top Layer to Bottom Layer, tented both sides, 94 vias
v2: diameter 19.68, hole 7.87, Top Layer to Bottom Layer, tented both sides, 25 vias

## Nets (pads, with @x,y where several pads share a name; then routed paths per layer and width w, separated by ;. In a path a pad name is that pad's centre, name@x,y a point inside that pad or via, vN(x,y) a via of type N, cw(c..) or ccw(c..) an arc to the next point about the centre after c; other vN are vias at no path point)
D_N: J3.2 R17.1 | length 775.5
  Bottom Layer w6: R17.1 3094.49,4698.91 3149.76,4643.65 3149.76,4624.7 3161.42,4613.04 3181.02,4613.04 3197.97,4596.08 3197.97,4485.85 3238.28,4445.54 3320.68,4445.54 3323.96,4448.82 3444.88,4448.82 3478.35,4415.35 J3.2
D_P: J3.3 R18.1 | length 764.1
  Top Layer w6: v1(3128.95,4633.85) v1(3173.22,4633.85)
  Bottom Layer w6: R18.1 v1@3122.05,4640.75 ; v1(3173.22,4633.85) v1@3177.16,4633.85 ; v1@3177.17,4633.86 3209.97,4601.05 3209.97,4490.82 3243.25,4457.54 3315.71,4457.54 3322.74,4464.57 3464.57,4464.57 3503.94,4425.2 J3.3
GND: C1.1 C2.1 C3.1 C4.1 C5.2 C6.1 C7.1 C8.2 C10.1 C11.1 C12.1 C13.1 Cage1.1 Cage1.2 Cage1.3 Cage1.4 Cage1.5 Cage1.6 Cage1.7 Cage1.8 Cage1.9 Cage1.10 Cage1.11 Cage1.12 Cage1.13 Cage1.14 Cage1.15 Cage1.16 Cage1.17 Cage1.18 Cage1.19 Cage1.20 CON1.6 IC1.1 J1.1 J1.4 J1.7 J1.8 J2.1 J2.10 J2.11 J2.14 J2.17 J2.20 J3.5 J3.6 J15.1 J15.4 J15.7 J15.8 R2.1 R8.1 R9.1 T1.2 T2.2 U1.5 U1.15 U1.23 U1.35 U1.43 U1.45 | length 2263.2
  Top Layer w10: v1(2507.87,4535.43) 2510.04,4533.27 J2.1 ; v1(2521.85,4249.8) J2.10 ; v1(2832.68,4509.84) 2834.65,4507.87 2834.65,4460.24 2840.35,4454.53 J2.17 ; v1(2834.65,4271.65) 2840.75,4265.55 J2.11 ; v1(2834.65,4350.39) 2844.29,4360.04 J2.14 ; v1(2913.38,4586.61) 2913.38,4570.66 ; 2913.38,4570.66 2913.38,4551.18 2911.22,4549.02 J2.20 2913.38,4570.66
  Bottom Layer w10: T2.2 1664.37,4165.35 Cage1.7 ; v1(1614.17,4488.19) 1620.08,4494.09 T1.2 ; v1(1685.04,4204.72) 1692.91,4196.85 C11.1 ; U1.23@1697.83,4358.27 1732.28,4358.27 v2(1744.09,4370.08) v2(1787.4,4413.39) v2(1830.71,4456.69) ; U1.35@1751.97,4589.57 1751.97,4535.43 v2(1787.4,4500) v2(1830.71,4456.69) ; U1.15@1870.08,4323.82 1870.08,4417.32 v2(1830.71,4456.69) ; U1.43@1909.45,4589.57 1909.45,4535.43 v2(1874.02,4500) U1.45@1850.39,4476.38 ; U1.5@1963.58,4476.38 U1.45@1850.39,4476.38 ; C13.1 v1(2019.68,4665.35) ; v1(2027.56,4149.61) C10.1 ; C12.1 v1(2090.55,4511.81) ; v1(2216.54,4216.54) R8.1 ; R9.1 v1(2263.78,4547.24) ; R2.1 2484.25,4132.87 Cage1.9 ; v1@2519.68,4251.97 v1(2521.85,4249.8) ; v1(2677.16,4527.55) 2677.16,4518.53 2681.91,4513.78 C3.1 ; C2.1 2791.34,4275.59 C1.1 2803.15,4271.65 v1(2834.65,4271.65) ; C4.1 v1(2832.68,4509.84) ; C5.2 3179.13,4379.92 v1(3188.98,4370.08) ; C8.2@3112.2,4557.09 3179.13,4557.09 3177.16,4559.06 v1(3177.16,4566.92) ; v1(3147.64,4675.2) C7.1 ; C6.1 3403.54,4220.47 J3.6@3416.34,4233.27 ; J3.5@3555.12,4232.28 3555.12,4297.24 v1(3557.09,4299.21) ; IC1.1 3593.7,4420.47 v1(3602.36,4429.13) ; v2(1830.71,4456.69) U1.45@1850.39,4476.38
  other v1: 3789.37,4249.61 3789.37,4399.6 3789.37,4549.61
  other v2: 1787.4,4370.08 1830.71,4370.08 1874.02,4370.08 1917.32,4370.08 1744.09,4413.39 1830.71,4413.39 1874.02,4413.39 1917.32,4413.39 1744.09,4456.69 1787.4,4456.69 1874.02,4456.69 1917.32,4456.69 1744.09,4500 1830.71,4500 1917.32,4500 1744.09,4543.31 1787.4,4543.31 1830.71,4543.31 1874.02,4543.31 1917.32,4543.31
LOS: J2.8 R12.1 T2.1 U1.20 | length 1272.9
  Top Layer w6: v1(1688.97,4255.9) 1693.09,4251.78 1796.31,4251.78 1819.56,4228.53 2107.98,4228.53 2119.04,4217.46 2136.86,4217.46 2137.04,4217.65 2154.29,4217.65 2166.48,4205.46 2166.48,4170.03 2186.9,4149.61 v1(2208.66,4149.61)
  Top Layer w15: v1(2501.77,4312.8) J2.8
  Bottom Layer w6: T2.1 1681.1,4240.16 1688.97,4248.03 v1(1688.97,4255.9) 1688.97,4271.58 1704.93,4287.54 1763.92,4287.54 1770.53,4294.15 1770.53,4322.69 U1.20@1771.65,4323.82 ; v1(2208.66,4149.61) 2209.79,4150.73 2292.08,4150.73 2293.21,4149.61 2324.89,4149.61 2329.96,4144.53 2347.2,4144.53 2359.39,4156.73 2359.39,4193.86 2357.14,4196.1 2357.14,4213.34 2369.33,4225.54 2383.02,4225.54 2392.57,4235.09 2392.57,4273.41 2397.85,4278.69 2434.2,4278.69 2466.54,4311.02 R12.1
MOD_DEF1: J2.5 R5.1 U1.18 | length 993.9
  Top Layer w6: v1(1821.1,4281.59) 1821.1,4280.4 1822.83,4278.67 1831.55,4287.39 1863.04,4255.91 2066.55,4255.91 2071.99,4261.34 v1(2089.06,4261.34)
  Top Layer w15: v1(2133.85,4401.57) 2137.44,4401.57 2156.38,4382.63 2331.78,4382.63 2356.43,4407.28 J2.5
  Bottom Layer w6: U1.18@1811.02,4323.82 U1.18 1811.02,4301.18 1822.83,4289.37 1821.1,4287.64 v1(1821.1,4281.59) ; v1(2089.06,4261.34) 2107.51,4261.34 2126.83,4280.65 2140.89,4280.65 2153.54,4293.31 R5.1
  Bottom Layer w15: v1(2133.85,4401.57) 2133.85,4387.79 2125.98,4379.92 R5.1@2152.76,4353.15 ; R5.1@2152.76,4349.61 R5.1@2152.76,4353.15 ; R5.1 2153.54,4352.36 R5.1@2152.76,4353.15
MOD_DEF2: J2.4 R4.1 U1.19 | length 1405.8
  Top Layer w6: v1(1791.34,4289.37) 1791.34,4281.92 1829.36,4243.91 2077.06,4243.91 2080.44,4240.53 2117.74,4240.53 2128.8,4229.46 2131.89,4229.46 2132.07,4229.65 2159.26,4229.65 2178.48,4210.43 2178.48,4197.97 2204.72,4171.72 2271.01,4171.72 2271.2,4171.53 2331.16,4171.53 2331.35,4171.72 2332.21,4171.72 v1(2338.58,4165.35)
  Top Layer w15: v1(2165.35,4409.45) 2171.18,4403.63 2323.08,4403.63 2358.23,4438.78 v1(2374.02,4438.78) J2.4
  Bottom Layer w6: v1(1791.34,4289.37) U1.19 U1.19@1791.34,4323.82 ; v1(2338.58,4165.35) 2338.58,4195.92 2343.87,4201.21 2343.87,4218.18 2349.55,4223.86 2349.55,4294.25 2341.39,4302.4 2341.39,4319.64 2343.87,4322.12 2343.87,4408.63 v1(2374.02,4438.78)
  Bottom Layer w15: R4.1@2152.76,4449.61 R4.1 2165.35,4437.01 v1(2165.35,4409.45)
MOD_PRESENT: J2.6 LD1.1 R6.1 R14.2 | length 1525
  Top Layer w6: v1(1543.31,4419.29) 1543.31,4385.83 1668.16,4260.97 1668.16,4247.28 1680.35,4235.09 1694.05,4235.09 1712.61,4216.53 2094.1,4216.53 2113.78,4196.84 v1(2145.67,4196.84)
  Top Layer w15: v1(2511.81,4374.02) 2513.58,4375.79 J2.6
  Bottom Layer w6: v1(2145.67,4196.84) 2205.15,4196.84 2206.27,4195.72 2225.16,4195.72 2243.25,4213.82 2243.25,4294.43 2331.87,4383.05 2331.87,4413.6 2353.2,4434.94 2353.2,4447.4 2365.4,4459.59 2388.83,4459.59 2472.44,4375.98 R6.1
  Bottom Layer w15: LD1.1 v1(1543.31,4419.29) R14.2@1604.33,4419.29 ; R6.1 2507.87,4370.08 v1(2511.81,4374.02)
NetC1_2: C1.2 C2.2 J2.15 L1.2 | length 318.3
  Top Layer w15: v1(2775.59,4389.76) 2777.36,4391.54 v1(2814.96,4391.54) J2.15
  Bottom Layer w15: L1.2@2673.23,4291.34 2673.23,4293.31 C2.2 2769.69,4389.76 v1(2775.59,4389.76) ; C1.2 2795.28,4346.82 2814.96,4366.5 v1(2814.96,4391.54)
NetC3_2: C3.2 C4.2 J2.16 L2.2 | length 257.7
  Top Layer w15: v1(2751.97,4411.42) 2763.58,4423.03 J2.16
  Bottom Layer w15: L2.2 2690.94,4478.35 C3.2 ; v1(2795.28,4417.32) C4.2
NetC9_2: C9.2 R14.1 | length 59.1
  Bottom Layer w6: C9.2 R14.1
NetC10_2: C10.2 Q1.1 U1.16 | length 274.4
  Bottom Layer w6: U1.16@1850.39,4323.82 U1.16 1850.39,4303.15 1855.65,4297.9 1855.65,4250.65 1889.76,4216.54 Q1.1 1982.28,4248.03 C10.2
NetC11_2: C11.2 Q1.2 U1.17 | length 243.3
  Bottom Layer w6: C11.2@1744.1,4259.84 C11.2 1748.03,4240.16 1748.03,4230.46 1753.94,4224.55 1757.03,4224.55 1765.05,4216.54 Q1.2 1834.65,4246.06 1834.65,4263.78 1841.92,4271.05 1841.92,4292.92 1830.71,4304.13 U1.17 U1.17@1830.71,4323.82
NetC12_2: C12.2 U1.6 | length 72.1
  Bottom Layer w6: U1.6@1963.58,4456.69 1965.74,4458.85 2010.03,4458.85 C12.2
NetJ2_9: J2.9 R1.1 R2.2 | length 162.1
  Top Layer w15: v1(2509.65,4281.3) J2.9
  Bottom Layer w15: R1.1 R2.2 2509.65,4277.36 v1(2509.65,4281.3)
NetLD1_2: LD1.2 R7.1 | length 58.3
  Bottom Layer w15: LD1.2 1384.84,4365.16 R7.1
NetLD2_1: LD2.1 T1.3 | length 92
  Bottom Layer w15: LD2.1 1500,4586.61 T1.3
NetLD2_2: LD2.2 R10.1 | length 59.5
  Bottom Layer w15: LD2.2 1385.83,4585.63 R10.1
NetLD3_1: LD3.1 T2.3 | length 92
  Bottom Layer w15: LD3.1 1490.16,4232.28 T2.3
NetLD3_2: LD3.2 R11.1 | length 59.5
  Bottom Layer w15: LD3.2 1375,4174.21 R11.1
NetLD4_1: LD4.1 U1.8 | length 71.4
  Bottom Layer w6: U1.8@1963.58,4417.32 1964.71,4416.2 1981.25,4416.2 1983.51,4418.45 1985.19,4418.45 1987.44,4416.2 2025.45,4416.2 LD4.1
NetLD4_2: LD4.2 R15.1 | length 97
  Bottom Layer w6: R15.1@2019.68,4370.08 2023.62,4370.08 2055.12,4401.57 2075.79,4401.57 LD4.2
NetLD5_1: LD5.1 U1.22 | length 655.5
  Top Layer w6: v1(1653.54,4338.58) 1593.36,4398.76 1593.36,4616.98 1623.17,4646.8 1790.21,4646.8 v1(1803.15,4633.86)
  Bottom Layer w6: v1(1653.54,4338.58) 1688.98,4338.58 1703.74,4323.82 U1.22@1732.28,4323.82 ; v1(1803.15,4633.86) 1803.15,4672.24 LD5.1
NetLD5_2: LD5.2 R16.1 | length 59.7
  Bottom Layer w6: R16.1 1685.04,4673.23 LD5.2
NetR17_2: R17.2 U1.3 | length 1154
  Bottom Layer w6: U1.3@1963.58,4515.75 U1.3 1989.41,4515.75 2001.41,4527.75 2055.31,4527.75 2157.29,4629.73 2259.16,4629.73 2269.15,4619.75 2705.8,4619.75 2713.95,4627.9 2746.68,4627.9 2748.59,4625.98 2834.65,4625.98 2874.02,4665.35 2997.05,4665.35 R17.2
NetR18_2: R18.2 U1.4 | length 1187.9
  Bottom Layer w6: U1.4@1963.58,4496.06 U1.4 1986.7,4496.06 2006.38,4515.75 2062.99,4515.75 2164.98,4617.73 2251.24,4617.73 2261.22,4607.75 2648.16,4607.75 2710.63,4545.28 2785.43,4545.28 2880.9,4640.75 R18.2
P3V3: C7.2 C8.1 CON1.2 IC1.3 L1.1 L2.1 R1.2 R3.2 R4.2 R5.2 R6.2 R7.2 R10.2 R11.2 R12.2 R13.2 R15.2 R16.2 U1.14 U1.24 U1.34 U1.44 | length 1339.3
  Bottom Layer w6: v1(1578.74,4673.23) 1582.68,4677.17 R16.2 ; v1(1665.35,4377.95) U1.24 U1.24@1697.83,4377.95 ; U1.34@1732.28,4589.57 U1.34 v1(1732.28,4625.98) ; U1.14@1889.76,4323.82 U1.14 1889.76,4287.4 v1(1897.64,4279.53) ; U1.44@1929.13,4589.57 U1.44 v1(1929.13,4622.05) ; R15.2 R13.2 v1(2125.98,4303.15)
  Bottom Layer w10: R10.2 v1(1500,4527.56) ; v1(2362.2,4311.02) R12.2 ; v1(2366.14,4377.95) 2401.57,4377.95 R6.2 ; v1(2377.95,4204.72) 2377.95,4196.85 2379.92,4194.88 2415.35,4194.88 R1.2 ; v1(2421.26,4566.93) 2423.23,4568.9 R3.2
  Bottom Layer w15: R7.2 1429.13,4299.21 v1(1437.01,4291.34) ; R11.2 1462.6,4196.85 v1(1476.38,4196.85)
  Bottom Layer w20: R4.2 R5.2 2255.91,4350.39 v1(2259.84,4346.46) ; v1(2627.95,4370.08) L1.1 v1(2657.48,4379.92) L2.1 v1(2687.01,4389.76) ; v1(3232.28,4559.05) 3303.16,4559.05 C8.1@3305.12,4557.09 ; C7.2 v1(3287.4,4675.2) ; v1(3307.09,4478.35) 3305.12,4480.31 C8.1@3305.12,4557.09 ; v1(3307.09,4645.67) 3305.12,4643.7 C8.1@3305.12,4557.09 ; v1(3338.58,4675.2) IC1.3@3452.76,4675.2
  other v1: 3342.52,4635.83
P5V0: C5.1 C6.2 C13.2 IC1.2 J3.1 U1.2 U1.7 | length 2274.4
  Top Layer w6: v1(1988.18,4578.73) 1988.18,4570.87 1996.06,4562.99 v1(1996.06,4437.01)
  Bottom Layer w6: U1.7@1963.58,4437.01 U1.7 1995.08,4437.01 2004.92,4446.85 2004.92,4445.87 v1(1996.06,4437.01) ; U1.2@1963.58,4535.43 U1.2 1992.13,4535.43 C13.2 ; v1(1988.18,4578.73) 2003.92,4562.99 C13.2 ; C5.1@3296.26,4371.06 3250.98,4371.06 3161.67,4460.38 3078.11,4460.38 3051.18,4487.31 3051.18,4610.3 3058.22,4617.33 3058.22,4725.39 3055.12,4728.49 2563.13,4728.49 2466.39,4631.75 2281.15,4631.75 2271.16,4641.73 2111.06,4641.73 2032.32,4562.99 C13.2 ; C6.2 3410.63,4335.83 IC1.2@3414.17,4335.83
  Bottom Layer w15: J3.1@3452.76,4232.28 3452.76,4297.24
  Bottom Layer w20: IC1.2@3414.17,4335.83 3452.76,4297.24
  Bottom Layer w23.54: C5.1@3296.26,4371.06 C5.1 3395.67,4379.92 IC1.2@3405.51,4370.08
PDI: CON1.4 U1.10 | length 1554.9
  Top Layer w6: v1(2283.46,4129.92) 2298.08,4144.53 2355.56,4144.53 2400.19,4189.17 2497.1,4189.17 2501.03,4185.23 2544.34,4185.23 2553.54,4176.03 2575.54,4176.03 2584.54,4185.03 v1(2598.42,4185.03)
  Bottom Layer w6: U1.10@1963.58,4377.95 U1.10@1965.55,4375.98 ; U1.10 1983.62,4377.95 1988.19,4373.38 1996.7,4373.38 2003.94,4366.14 2003.94,4338.58 2010.68,4331.83 2052.94,4331.83 2067.77,4317 2067.77,4279.74 2068.24,4279.26 2068.24,4240.56 2129.34,4179.46 2129.75,4179.06 2130.66,4179.97 2130.99,4179.97 2182.16,4128.8 2282.34,4128.8 v1(2283.46,4129.92) ; v1(2598.42,4185.03) 2610.88,4172.57 2664.52,4172.57 2690.17,4146.92 2756.62,4146.92 2789.16,4179.46 2929.94,4179.46 2952.26,4157.15 2952.34,4157.15 2964.87,4144.62 3031.1,4144.62 3058.23,4117.48 3091.37,4117.48 3114.8,4140.91 3114.8,4197.48 CON1.4
PDO: CON1.1 U1.11 | length 1283.3
  Top Layer w6: v1(1964.57,4338.58) 2041.24,4338.58 2109.87,4269.96 2109.87,4265.37 2133.59,4241.65 2164.23,4241.65 2190.48,4215.4 2190.48,4205.85 2212.6,4183.72 2275.98,4183.72 2276.17,4183.53 2326.19,4183.53 2349.08,4206.42 2349.08,4206.5 2368.3,4225.72 2395.48,4225.72 2407.48,4213.72 2506.75,4213.72 2523.24,4197.23 2566.54,4197.23 v1(2566.92,4196.84)
  Bottom Layer w6: U1.11@1963.58,4358.27 1963.58,4339.57 v1(1964.57,4338.58) ; v1(2566.92,4196.84) 2575.92,4205.84 2662.06,4205.84 2708.98,4158.92 2751.65,4158.92 2784.19,4191.46 2934.91,4191.46 2957.23,4169.15 2957.31,4169.15 2969.31,4157.15 3074.47,4157.15 CON1.1
RATE_SEL: J2.7 R8.2 U1.27 | length 1118.3
  Top Layer w6: v1(1652.39,4456.3) 1676.77,4456.3 1699.99,4433.07 1970.57,4433.07 1987.44,4416.2 2004.68,4416.2 2004.82,4416.34 2042.23,4416.34 2146.8,4311.77 2146.8,4307.93 2163.39,4291.34 v1(2185.04,4291.34)
  Top Layer w15: v1(2185.04,4291.34) 2256.88,4291.34 2309.83,4344.29 J2.7
  Bottom Layer w6: v1(1652.39,4456.3) 1657.88,4456.3 1677.17,4437.01 U1.27 U1.27@1697.83,4437.01
  Bottom Layer w15: R8.2@2151.18,4249.61 R8.2 2153.54,4259.84 v1(2185.04,4291.34)
RD_N: J1.5 J2.12 J15.3 | length 1000.3
  Top Layer w20: J2.12 2995.23,4297.05 3010.51,4312.32 3446.18,4312.32 3464.57,4330.71 3651.41,4330.71 3651.41,4301.02 v1(3641.73,4291.34)
  Bottom Layer w20: v1(3641.73,4291.34) 3641.73,4310.98 3671.35,4340.61 3731,4340.61 3740,4349.61 v1(3789.37,4349.61)
RD_P: J1.6 J2.13 J15.2 | length 991
  Top Layer w20: J2.13 2989.96,4328.54 2999.74,4338.32 3435.41,4338.32 3453.8,4356.71 3662.18,4356.71 3677.41,4341.48 3677.41,4295.01 v1(3681.1,4291.33)
  Bottom Layer w20: v1(3681.1,4291.33) 3681.1,4311.02 3684.69,4314.61 3725,4314.61 3740,4299.61 v1(3789.37,4299.61)
RESETn: C9.1 CON1.5 R13.1 U1.13 | length 1954.4
  Top Layer w6: v1(1681.1,4295.28) 1696.01,4310.18 1929.97,4310.18 1940.94,4299.21 v1(1972.44,4299.21) ; v1(2075.93,4181.1) 2129.85,4181.1 2200.72,4110.24 2273.72,4110.24 2274.84,4109.11 2342.77,4109.11 2406.89,4173.23 2539.37,4173.23 2552.02,4160.57 2835.2,4160.57 v1(2842.52,4153.25)
  Bottom Layer w6: C9.1 v1(1681.1,4295.28) ; U1.13@1909.45,4323.82 U1.13 1909.45,4304.13 1923.37,4290.21 1934.9,4290.21 1943.9,4299.21 v1(1972.44,4299.21) R13.1@2031.5,4299.21 ; v1(2075.93,4181.1) 2056.24,4200.79 2056.24,4274.29 2055.77,4274.77 2055.77,4274.94 R13.1@2031.5,4299.21 ; v1(2842.52,4153.25) 2842.52,4158.46 2851.52,4167.46 2924.97,4167.46 2947.29,4145.15 2947.37,4145.15 2987.04,4105.48 3096.34,4105.48 3102.01,4111.15 3185.04,4111.15 3231.37,4157.48 CON1.5 ; R13.1@2031.5,4299.21 2035.43,4299.21 R13.1 R13.1@2031.5,4299.21
SCK: CON1.3 U1.9 | length 1414.3
  Top Layer w6: v1(2000.89,4394.19) 2002.6,4394.19 2121.87,4274.93 2121.87,4270.34 2138.56,4253.65 2242.53,4253.65 2281.14,4292.27 2345.91,4292.27 2412.45,4225.72 2534.12,4225.72 2535.43,4224.41 v1(2535.43,4220.46) ; v1@3032.34,4197.48 3134.8,4197.48 CON1.3
  Bottom Layer w6: U1.9@1963.58,4397.64 U1.9@1965.55,4395.67 ; U1.9 1992.62,4397.64 v1@1996.06,4394.19 ; v1(2535.43,4220.46) 2664.4,4220.46 2713.95,4170.92 2746.68,4170.92 2779.22,4203.46 2908.58,4203.46 2957.23,4252.11 2991.59,4252.11 3015.89,4227.81 3015.89,4193.45
  other v1: 3027.55,4200.78
TD_N: J1.3 J2.19 J15.5 | length 1019.1
  Top Layer w20: J2.19 2982.09,4517.52 2999.74,4535.17 3203.05,4535.17 3208.95,4529.28 3231.99,4529.28 3233.95,4531.23 3243.8,4531.23 3247.74,4535.17 3633.49,4535.17 3682.29,4486.37 3682.29,4430.32 v1(3681.1,4429.13)
  Bottom Layer w20: v1(3681.1,4429.13) 3681.1,4444.92 3700.79,4464.61 3725,4464.61 3740,4449.61 v1(3789.37,4449.61)
TD_P: J1.2 J2.18 J15.6 | length 1021.9
  Top Layer w20: J2.18 2987.36,4486.02 3010.51,4509.17 3192.28,4509.17 3198.18,4503.28 3242.76,4503.28 3244.72,4505.23 3254.57,4505.23 3258.51,4509.17 3622.72,4509.17 3656.29,4475.6 3656.29,4443.65 3651.48,4438.84 v1(3651.48,4429.13)
  Bottom Layer w20: v1(3651.48,4429.13) 3651.48,4452.07 3690.02,4490.61 3731,4490.61 3740,4499.61 v1(3789.37,4499.61)
TX_DIS: J2.3 R9.2 U1.26 | length 1229.1
  Top Layer w6: v1@1652.42,4430.25 v1(1657.48,4425.19) 1642.55,4425.19 1631.57,4436.16 1631.57,4464.92 1645.94,4479.28 1648.57,4479.28 1754.53,4585.24 1944.38,4585.24 1960.69,4601.54 2106.14,4601.54 2165.35,4542.32 v1(2165.35,4507.87)
  Top Layer w10: v1(2165.35,4507.87) 2175.2,4517.72 2332.68,4517.72 2380.12,4470.28 J2.3
  Bottom Layer w6: v1(1657.48,4425.19) 1657.48,4421.26 1661.42,4417.32 U1.26 U1.26@1697.83,4417.32
  Bottom Layer w10: R9.2 2163.39,4509.84 v1(2165.35,4507.87)
TX_FAULT: J2.2 R3.1 T1.1 U1.25 | length 1320.8
  Top Layer w10: v1(1673.23,4606.3) 1688.98,4590.55 1740.04,4590.55 1748.73,4599.24 1938.58,4599.24 1954.89,4615.54 2278.16,4615.54 2391.93,4501.77 J2.2
  Bottom Layer w10: T1.1 1661.42,4594.49 1653.54,4586.61 1653.54,4481.07 1651.58,4479.11 1642.94,4479.11 1629.57,4465.74 1629.57,4446.85 1634.67,4441.76 1634.67,4415.74 1649.64,4400.76 1694.71,4400.76 U1.25@1697.83,4397.64 ; v1(2421.26,4507.87) 2468.5,4507.87 R3.1
pads on no net: FTG13.FTG2 FTG14.1 FTG16.1 J2.MTG1 J2.MTG2 J3.4 J3.PastePad U1.1 U1.12 U1.21 U1.28 U1.29 U1.30 U1.31 U1.32 U1.33 U1.36 U1.37 U1.38 U1.39 U1.40 U1.41 U1.42
copper on no net: | length 103920.8
  Top Layer w1: 4513.55,5883.15 4613.23,5982.83 4733.23,6102.83 4853.23,6222.83 4973.23,6342.83 5093.23,6462.83 5213.23,6582.83 5333.23,6702.83 5453.23,6822.83 5573.23,6942.83 5633.23,7002.83 ; 4513.55,5943.15 4553.23,5982.83 4673.23,6102.83 4793.23,6222.83 4913.23,6342.83 5033.23,6462.83 5153.23,6582.83 5273.23,6702.83 5393.23,6822.83 5513.23,6942.83 5633.23,7062.83 ; 4513.55,6003.15 4613.23,6102.83 4733.23,6222.83 4853.23,6342.83 4973.23,6462.83 5093.23,6582.83 5213.23,6702.83 5333.23,6822.83 5453.23,6942.83 5573.23,7062.83 5633.23,7122.83 ; 4513.55,6063.15 4553.23,6102.83 4673.23,6222.83 4793.23,6342.83 4913.23,6462.83 5033.23,6582.83 5153.23,6702.83 5273.23,6822.83 5393.23,6942.83 5513.23,7062.83 5633.23,7182.83 ; 4513.55,6123.15 4613.23,6222.83 4733.23,6342.83 4853.23,6462.83 4973.23,6582.83 5093.23,6702.83 5213.23,6822.83 5333.23,6942.83 5453.23,7062.83 5573.23,7182.83 ; 4513.55,6183.15 4553.23,6222.83 4673.23,6342.83 4793.23,6462.83 4913.23,6582.83 5033.23,6702.83 5153.23,6822.83 5273.23,6942.83 5393.23,7062.83 5513.23,7182.83 ; 4513.55,6243.15 4613.23,6342.83 4733.23,6462.83 4853.23,6582.83 4973.23,6702.83 5093.23,6822.83 5213.23,6942.83 5333.23,7062.83 5453.23,7182.83 ; 4513.55,6303.15 4553.23,6342.83 4673.23,6462.83 4793.23,6582.83 4913.23,6702.83 5033.23,6822.83 5153.23,6942.83 5273.23,7062.83 5393.23,7182.83 ; 4513.55,6363.15 4613.23,6462.83 4733.23,6582.83 4853.23,6702.83 4973.23,6822.83 5093.23,6942.83 5213.23,7062.83 5333.23,7182.83 ; 4513.55,6423.15 4553.23,6462.83 4673.23,6582.83 4793.23,6702.83 4913.23,6822.83 5033.23,6942.83 5153.23,7062.83 5273.23,7182.83 ; 4513.55,6483.15 4613.23,6582.83 4733.23,6702.83 4853.23,6822.83 4973.23,6942.83 5093.23,7062.83 5213.23,7182.83 ; 4513.55,6543.15 4553.23,6582.83 4673.23,6702.83 4793.23,6822.83 4913.23,6942.83 5033.23,7062.83 5153.23,7182.83 ; 4513.55,6603.15 4613.23,6702.83 4733.23,6822.83 4853.23,6942.83 4973.23,7062.83 5093.23,7182.83 ; 4513.55,6663.15 4553.23,6702.83 4673.23,6822.83 4793.23,6942.83 4913.23,7062.83 5033.23,7182.83 ; 4513.55,6723.15 4613.23,6822.83 4733.23,6942.83 4853.23,7062.83 4973.23,7182.83 ; 4513.55,6783.15 4553.23,6822.83 4673.23,6942.83 4793.23,7062.83 4913.23,7182.83 ; 4513.55,6843.15 4613.23,6942.83 4733.23,7062.83 4853.23,7182.83 ; 4513.55,6903.15 4553.23,6942.83 4673.23,7062.83 4793.23,7182.83 ; 4513.55,6963.15 4613.23,7062.83 4733.23,7182.83 ; 4513.55,7023.15 4553.23,7062.83 4673.23,7182.83 ; 4513.55,7083.15 4613.23,7182.83 ; 4513.55,7143.15 4553.23,7182.83 ; 4553.23,5862.83 4673.23,5982.83 4793.23,6102.83 4913.23,6222.83 5033.23,6342.83 5153.23,6462.83 5273.23,6582.83 5393.23,6702.83 5513.23,6822.83 5633.23,6942.83 ; 4613.23,5862.83 4733.23,5982.83 4853.23,6102.83 4973.23,6222.83 5093.23,6342.83 5213.23,6462.83 5333.23,6582.83 5453.23,6702.83 5573.23,6822.83 5633.23,6882.83 ; 4673.23,5862.83 4793.23,5982.83 4913.23,6102.83 5033.23,6222.83 5153.23,6342.83 5273.23,6462.83 5393.23,6582.83 5513.23,6702.83 5633.23,6822.83 ; 4733.23,5862.83 4853.23,5982.83 4973.23,6102.83 5093.23,6222.83 5213.23,6342.83 5333.23,6462.83 5453.23,6582.83 5573.23,6702.83 5633.23,6762.83 ; 4793.23,5862.83 4913.23,5982.83 5033.23,6102.83 5153.23,6222.83 5273.23,6342.83 5393.23,6462.83 5513.23,6582.83 5633.23,6702.83 ; 4853.23,5862.83 4973.23,5982.83 5093.23,6102.83 5213.23,6222.83 5333.23,6342.83 5453.23,6462.83 5573.23,6582.83 5633.23,6642.83 ; 4913.23,5862.83 5033.23,5982.83 5153.23,6102.83 5273.23,6222.83 5393.23,6342.83 5513.23,6462.83 5633.23,6582.83 ; 4973.23,5862.83 5093.23,5982.83 5213.23,6102.83 5333.23,6222.83 5453.23,6342.83 5573.23,6462.83 5633.23,6522.83 ; 5033.23,5862.83 5153.23,5982.83 5273.23,6102.83 5393.23,6222.83 5513.23,6342.83 5633.23,6462.83 ; 5093.23,5862.83 5213.23,5982.83 5333.23,6102.83 5453.23,6222.83 5573.23,6342.83 5633.23,6402.83 ; 5153.23,5862.83 5273.23,5982.83 5393.23,6102.83 5513.23,6222.83 5633.23,6342.83 ; 5213.23,5862.83 5333.23,5982.83 5453.23,6102.83 5573.23,6222.83 5633.23,6282.83 ; 5273.23,5862.83 5393.23,5982.83 5513.23,6102.83 5633.23,6222.83 ; 5333.23,5862.83 5453.23,5982.83 5573.23,6102.83 5633.23,6162.83 ; 5393.23,5862.83 5513.23,5982.83 5633.23,6102.83 ; 5453.23,5862.83 5573.23,5982.83 5633.23,6042.83 ; 5513.23,5862.83 5633.23,5982.83 ; 5573.23,5862.83 5633.23,5922.83